# EAGLE board MTP_worp1 (EAGLE 7.5.0)
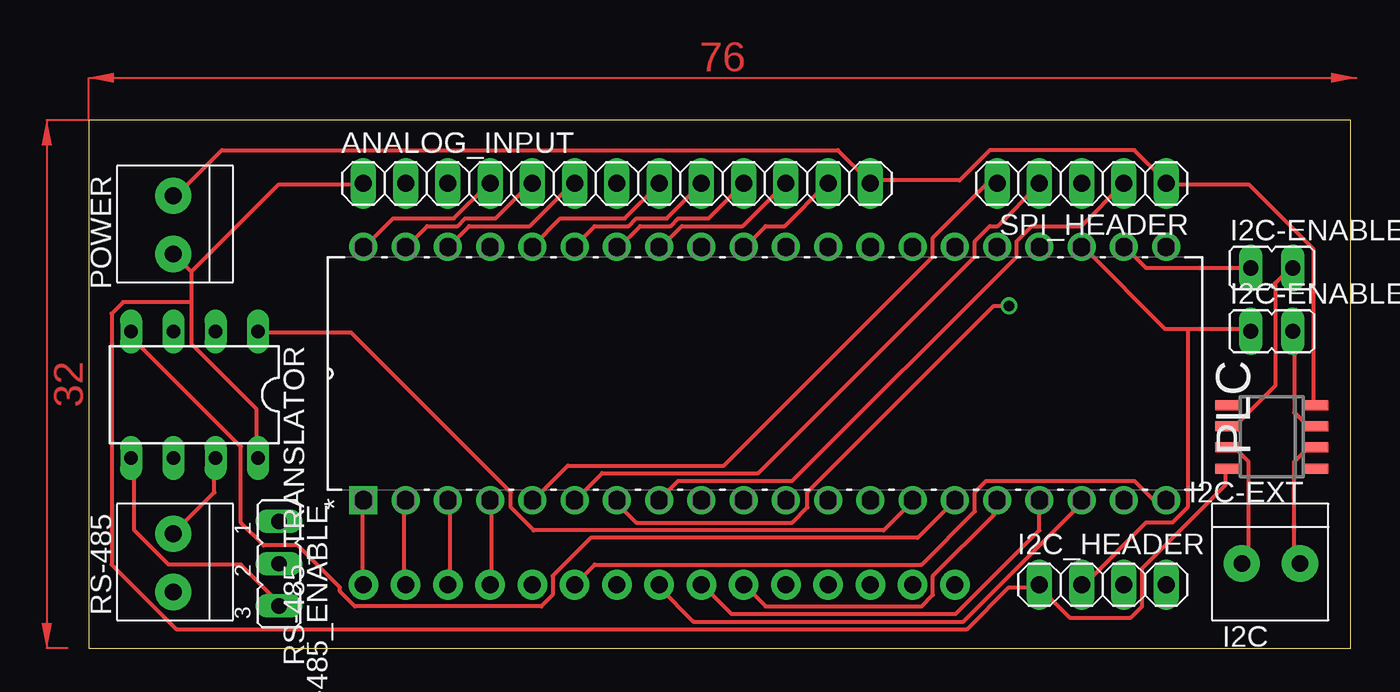
[diagram p0: board, top side]
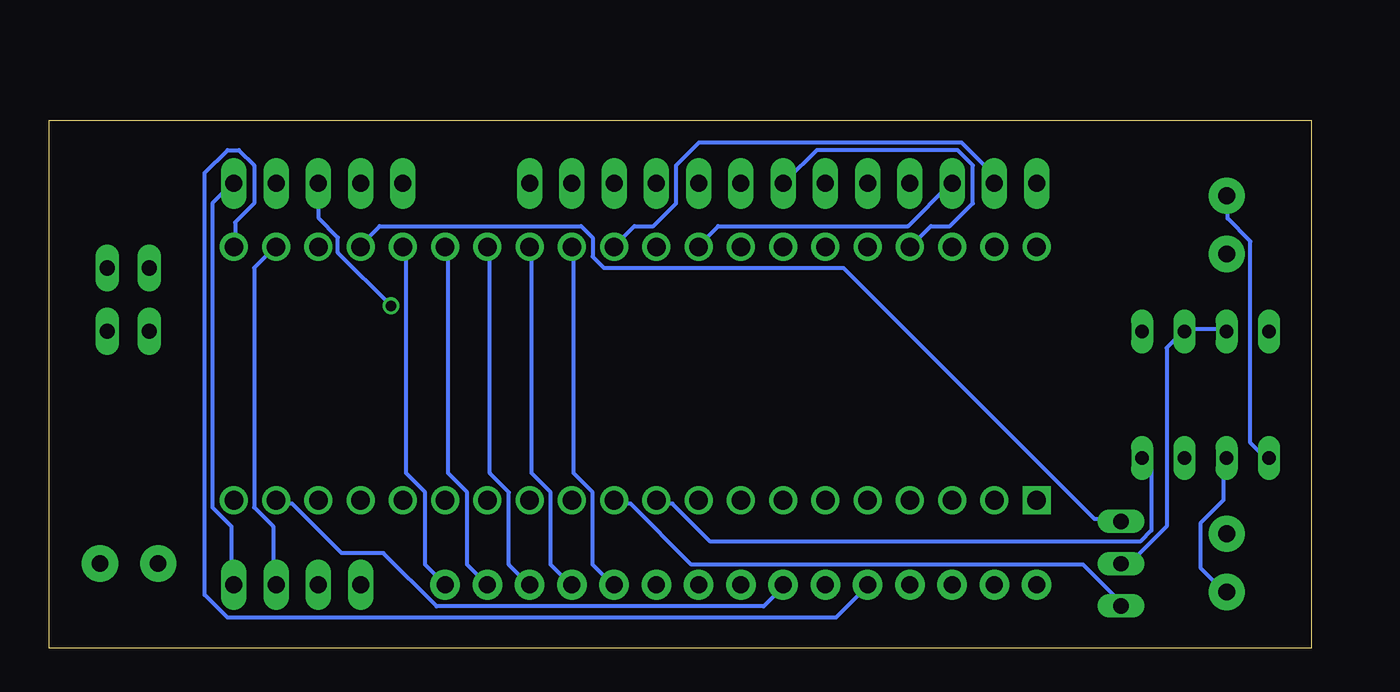
[diagram p1: board, bottom side, seen from below]

Size 75.87 x 31.74 mm. Coordinates in mm from the lower left corner, seen from the top.
Outline: 0,0 75.87,0 75.87,31.74 0,31.74 0,0
Copper layers (1*16): Top 0.035mm / dielectric 1.5mm / Bottom 0.035mm
Design rules "default": minimum track width 10mil, minimum drill 24mil, track to track 8mil, track to pad 8mil, pad to pad 8mil, via to via 8mil, smd to smd 8mil, copper to edge 40mil, drill to drill 8mil, minimum pad ring 10mil, minimum via ring 8mil, stop-mask expansion 4mil, vias tented up to drill 0mil, thermal gap 10mil

## Footprints (pad centres in the part's own frame; a part is rotated, then mirrored left to right if it is on the bottom)
1X13 = drill 1.016 long: 1 -15.24,0; 2 -12.7,0; 3 -10.16,0; 4 -7.62,0; 5 -5.08,0; 6 -2.54,0; 7 0,0; 8 2.54,0; 9 5.08,0; 10 7.62,0; 11 10.16,0; 12 12.7,0; 13 15.24,0
1X15-CB = drill 1.016 pad 1.778: 1 -17.78,0; 2 -15.24,0; 3 -12.7,0; 4 -10.16,0; 5 -7.62,0; 6 -5.08,0; 7 -2.54,0; 8 0,0; 9 2.54,0; 10 5.08,0; 11 7.62,0; 12 10.16,0; 13 12.7,0; 14 15.24,0; 15 17.78,0
1X2-3.5MM = drill 1 pad 2.184: 1 1.8,0; 2 -1.7,0
JP1 = drill 0.914 long: 1 0,-1.27; 2 0,1.27
SO8 = smd 0.6 x 1.6: 1 -1.905,-2.6; 2 -0.635,-2.6; 3 0.635,-2.6; 4 1.905,-2.6; 5 1.905,2.6; 6 0.635,2.6; 7 -0.635,2.6; 8 -1.905,2.6
1X04 = drill 1.016 long: 1 -3.81,0; 2 -1.27,0; 3 1.27,0; 4 3.81,0
DIP254P1524X482-40 = drill 1.118 square: 1 -15.24,48.26 | drill 1.118: 2 -15.24,45.72; 3 -15.24,43.18; 4 -15.24,40.64; 5 -15.24,38.1; 6 -15.24,35.56; 7 -15.24,33.02; 8 -15.24,30.48; 9 -15.24,27.94; 10 -15.24,25.4; 11 -15.24,22.86; 12 -15.24,20.32; 13 -15.24,17.78; 14 -15.24,15.24; 15 -15.24,12.7; 16 -15.24,10.16; 17 -15.24,7.62; 18 -15.24,5.08; 19 -15.24,2.54; 20 -15.24,0; 21 0,0; 22 0,2.54; 23 0,5.08; 24 0,7.62; 25 0,10.16; 26 0,12.7; 27 0,15.24; 28 0,17.78; 29 0,20.32; 30 0,22.86; 31 0,25.4; 32 0,27.94; 33 0,30.48; 34 0,33.02; 35 0,35.56; 36 0,38.1; 37 0,40.64; 38 0,43.18; 39 0,45.72; 40 0,48.26
JP2 = drill 0.914 long: 1 -2.54,0; 2 0,0; 3 2.54,0
DIL08 = drill 0.813 long: 1 -3.81,-3.81; 2 -1.27,-3.81; 3 1.27,-3.81; 4 3.81,-3.81; 5 3.81,3.81; 6 1.27,3.81; 7 -1.27,3.81; 8 -3.81,3.81
1X05 = drill 1.016 long: 1 -5.08,0; 2 -2.54,0; 3 0,0; 4 2.54,0; 5 5.08,0

## Placement (x,y rotation side)
ANALOG_INPUT  [1X13]  31.75,27.94 0 top
GPIO  [1X15-CB]  34.29,3.81 0 top
I2C  1X2-3.5MM  [1X2-3.5MM]  71.12,5.08 180 top
I2C-ENABLE1  [JP1]  71.12,19.05 270 top
I2C-ENABLE2  [JP1]  71.12,22.86 270 top
I2C-EXT  P82B715  [SO8]  71.12,12.7 90 top
I2C_HEADER  [1X04]  60.96,3.81 0 top
PLC  ATMEGA32  [DIP254P1524X482-40]  64.77,24.13 90 top
POWER  1X2-3.5MM  [1X2-3.5MM]  5.08,25.4 90 top
RS-485  1X2-3.5MM  [1X2-3.5MM]  5.08,5.08 90 top
RS-485_ENABLE  [JP2]  11.43,5.08 270 top
RS-485_TRANSLATOR  MAX485  [DIL08]  6.35,15.24 180 top
SPI_HEADER  [1X05]  59.69,27.94 180 top

## Library data of the parts
ANALOG_INPUT I2C_HEADER SPI_HEADER = pinhead
GPIO I2C POWER RS-485 = adafruit
I2C-ENABLE1 I2C-ENABLE2 RS-485_ENABLE = jumper
I2C-EXT = micro-philips; MPN: P82B715TD,118; OC_FARNELL: 1627047; OC_NEWARK: 70R8457
PLC = ArpanMTP1
RS-485_TRANSLATOR = maxim; OC_FARNELL: unknown; OC_NEWARK: unknown

## Nets
ADC0: ANALOG_INPUT.4 PLC.40
ADC1: ANALOG_INPUT.5 PLC.39
ADC2: ANALOG_INPUT.6 PLC.38
ADC3: ANALOG_INPUT.7 PLC.37
ADC4: ANALOG_INPUT.8 PLC.36
ADC5: ANALOG_INPUT.9 PLC.35
ADC6: ANALOG_INPUT.10 PLC.34
ADC7: ANALOG_INPUT.11 PLC.33
AGND: ANALOG_INPUT.12 PLC.31
AREF: ANALOG_INPUT.3 PLC.32
AVCC: ANALOG_INPUT.2 PLC.30
GND: ANALOG_INPUT.13 I2C-EXT.4 I2C_HEADER.4 PLC.11 POWER.1 RS-485_ENABLE.3 RS-485_TRANSLATOR.5 SPI_HEADER.1
GPIO1: GPIO.1 PLC.1
GPIO2: GPIO.2 PLC.2
GPIO3: GPIO.3 PLC.3
GPIO4: GPIO.4 PLC.4
GPIO5: GPIO.5 PLC.21
GPIO6: GPIO.6 PLC.20
GPIO7: GPIO.7 PLC.19
GPIO8: GPIO.8 PLC.18
GPIO9: GPIO.9 PLC.17
GPIO10: GPIO.10 PLC.16
GPIO11: GPIO.11 PLC.29
GPIO12: GPIO.12 PLC.28
GPIO13: GPIO.13 PLC.27
GPIO14: GPIO.14 PLC.26
GPIO15: GPIO.15 PLC.25
GPIO16: PLC.24 RS-485_ENABLE.1
LCL: I2C-EXT.7 I2C.1
LDA: I2C-EXT.2 I2C.2
MISO: PLC.7 SPI_HEADER.3
MOSI: PLC.6 SPI_HEADER.4
N$1: I2C-ENABLE2.2 I2C-EXT.6
N$13: I2C-ENABLE1.2 I2C-EXT.3
RS-485_A: RS-485.1 RS-485_TRANSLATOR.7
RS-485_B: RS-485.2 RS-485_TRANSLATOR.6
RS-485_MODE_SELECT: RS-485_ENABLE.2 RS-485_TRANSLATOR.2 RS-485_TRANSLATOR.3
RXD: PLC.14 RS-485_TRANSLATOR.1
SCK: PLC.8 SPI_HEADER.2
SCL: I2C-ENABLE2.1 I2C_HEADER.3 PLC.22
SDA: I2C-ENABLE1.1 I2C_HEADER.2 PLC.23
SS: PLC.5 SPI_HEADER.5
TXD: PLC.15 RS-485_TRANSLATOR.4
VCC: ANALOG_INPUT.1 I2C-EXT.8 I2C_HEADER.1 PLC.10 POWER.2 RS-485_TRANSLATOR.8

## Tracks (layer width: path | path; a pad name or v marks a point on that pad's centre or on a via)
ADC0
  Top 0.254: ANALOG_INPUT.4 24,27.89 21.95,25.83 18.29,25.83 16.69,24.23 PLC.40
ADC1
  Top 0.254: ANALOG_INPUT.5 26.52,27.89 24.46,25.83 22.63,25.83 22.17,25.38 20.34,25.38 19.2,24.23 PLC.39
ADC2
  Top 0.254: ANALOG_INPUT.6 29.03,27.89 26.52,25.38 22.86,25.38 21.72,24.23 PLC.38
ADC3
  Bottom 0.254: ANALOG_INPUT.7 31.55,28.12 29.72,29.95 21.26,29.95 20.34,29.03 20.34,26.75 21.72,25.38 22.86,25.38 24,24.23 PLC.37
ADC4
  Top 0.254: ANALOG_INPUT.8 34.29,27.89 32.23,25.83 28.35,25.83 26.75,24.23 PLC.36
ADC5
  Top 0.254: ANALOG_INPUT.9 36.8,27.89 34.75,25.83 32.92,25.83 32.46,25.38 30.4,25.38 29.26,24.23 PLC.35
ADC6
  Top 0.254: ANALOG_INPUT.10 37.26,25.83 35.43,25.83 34.98,25.38 33.15,25.38 31.77,24 PLC.34
ADC7
  Top 0.254: ANALOG_INPUT.11 41.83,27.89 39.32,25.38 35.66,25.38 34.29,24 PLC.33
AGND
  Top 0.254: ANALOG_INPUT.12 44.35,27.89 41.83,25.38 40.69,25.38 39.55,24.23 PLC.31
AREF
  Bottom 0.254: ANALOG_INPUT.3 21.72,27.89 24.23,25.38 35.66,25.38 36.8,24.23 PLC.32
AVCC
  Bottom 0.254: ANALOG_INPUT.2 19.2,28.12 19.2,28.57 21.03,30.4 36.8,30.4 38.18,29.03 38.18,26.75 39.55,25.38 40.69,25.38 41.83,24.23 PLC.30
GND
  Top 0.254: I2C-EXT.4 73.61,14.63 73.61,24 69.72,27.89 64.92,27.89 SPI_HEADER.1 64.69,28.12 62.87,29.95 54.18,29.95 52.35,28.12 47.09,28.12 ANALOG_INPUT.13 46.86,28.12 45.03,29.95 8,29.95 5.26,27.2 POWER.1 | RS-485_TRANSLATOR.5 2.74,11.43 2.74,7.09 4.8,5.03 9.14,5.03 11.43,2.74 RS-485_ENABLE.3
  Bottom 0.254: I2C_HEADER.4 64.92,3.89 64.92,7.32 66.06,8.46 66.06,26.75 64.92,27.89 SPI_HEADER.1 | PLC.11 41.83,8.69 40.92,8.69 37.26,5.03 13.72,5.03 11.43,2.74 RS-485_ENABLE.3 | POWER.1 5.03,26.98 5.03,25.83 3.66,24.46 3.66,12.34 2.74,11.43 RS-485_TRANSLATOR.5
GPIO1
  Top 0.254: PLC.1 16.46,8.69 16.46,3.89 GPIO.1
GPIO2
  Top 0.254: PLC.2 18.97,8.69 18.97,3.89 GPIO.2
GPIO3
  Top 0.254: PLC.3 21.72,8.69 21.72,3.89 GPIO.3
GPIO4
  Top 0.254: PLC.4 24.23,8.69 24.23,3.89 GPIO.4
GPIO5
  Bottom 0.254: PLC.21 64.69,24.23 64.69,25.6 63.55,26.75 63.55,29.03 64.47,29.95 65.15,29.95 66.52,28.57 66.52,3.2 65.15,1.83 28.57,1.83 26.75,3.66 GPIO.5
GPIO6
  Top 0.254: PLC.20 64.69,8.91 64.01,8.91 62.87,10.06 53.95,10.06 53.26,9.37 53.26,8.23 50.06,5.03 30.4,5.03 29.26,3.89 GPIO.6
GPIO7
  Bottom 0.254: PLC.19 62.18,8.69 61.27,8.69 58.29,5.71 55.78,5.71 52.58,2.52 32.92,2.52 31.77,3.66 GPIO.7
GPIO8
  Top 0.254: PLC.18 59.66,8.69 52.58,1.6 36.35,1.6 34.29,3.66 GPIO.8
GPIO9
  Top 0.254: PLC.17 57.15,7.09 52.12,2.06 38.63,2.06 37.03,3.66 GPIO.9
GPIO10
  Top 0.254: PLC.16 54.41,8.69 54.41,8 50.75,4.34 50.75,3.2 50.06,2.52 40.69,2.52 39.55,3.66 GPIO.10
GPIO11
  Bottom 0.254: PLC.29 44.35,24 44.35,10.52 43.2,9.37 43.2,5.03 42.06,3.89 GPIO.11
GPIO12
  Bottom 0.254: PLC.28 46.86,24 46.86,10.52 45.72,9.37 45.72,5.03 44.58,3.89 GPIO.12
GPIO13
  Bottom 0.254: PLC.27 49.38,24 49.38,10.52 48.23,9.37 48.23,5.03 47.09,3.89 GPIO.13
GPIO14
  Bottom 0.254: GPIO.14 50.75,5.03 50.75,9.37 51.89,10.52 51.89,24 PLC.26
GPIO15
  Bottom 0.254: PLC.25 54.41,24 54.41,10.52 53.26,9.37 53.26,5.03 52.12,3.89 GPIO.15
GPIO16
  Bottom 0.254: RS-485_ENABLE.1 11.43,7.77 13.03,7.77 28.12,22.86 42.52,22.86 43.2,23.55 43.2,24.69 43.89,25.38 56.01,25.38 57.15,24.23 PLC.24
LCL
  Top 0.254: I2C-EXT.7 68.58,11.89 69.04,11.89 69.72,11.2 69.72,5.49 69.49,5.26 I2C.1
LDA
  Top 0.254: I2C-EXT.2 73.61,11.89 73.15,11.89 72.47,11.2 72.47,5.49 72.69,5.26 I2C.2
MISO  (via drill 0.61)
  Top 0.254: v55.32,20.57 54.41,20.57 43.2,9.37 43.2,8.46 42.29,7.54 32.92,7.54 31.77,8.69 PLC.7
  Bottom 0.254: v55.32,20.57 58.52,23.77 58.52,24.69 59.66,25.83 59.66,27.89 SPI_HEADER.3
MOSI
  Top 0.254: SPI_HEADER.4 57.15,27.89 54.63,25.38 54.18,25.38 53.26,24.46 53.26,23.55 40.23,10.52 30.86,10.52 29.26,8.91 PLC.6
N$1
  Top 0.254: I2C-EXT.6 68.58,13.49 69.04,13.49 71.32,15.77 71.32,21.95 72.24,22.86 I2C-ENABLE2.2
N$13
  Top 0.254: I2C-EXT.3 73.61,13.49 73.15,13.49 72.47,14.17 72.47,18.97 I2C-ENABLE1.2
RS-485_A
  Top 0.254: RS-485_TRANSLATOR.7 7.54,11.43 7.54,9.37 5.26,7.09 RS-485.1
RS-485_B
  Bottom 0.254: RS-485_TRANSLATOR.6 5.26,11.43 5.26,8.91 6.63,7.54 6.63,4.8 5.26,3.43 RS-485.2
RS-485_MODE_SELECT
  Bottom 0.254: RS-485_TRANSLATOR.3 5.26,19.2 7.54,19.2 RS-485_TRANSLATOR.2 7.77,18.97 8.69,18.06 8.69,7.32 10.74,5.26 11.43,5.26 RS-485_ENABLE.2
RXD
  Top 0.254: RS-485_TRANSLATOR.1 10.29,18.97 15.77,18.97 25.38,9.37 25.38,8.46 26.75,7.09 47.78,7.09 49.38,8.69 PLC.14
SCK
  Top 0.254: SPI_HEADER.2 59.66,25.38 56.69,25.38 55.78,24.46 55.78,23.55 42.29,10.06 35.43,10.06 34.29,8.91 PLC.8
SCL
  Top 0.254: I2C-ENABLE2.1 63.55,22.86 62.41,24 PLC.22
  Bottom 0.254: I2C_HEADER.3 62.41,3.89 62.41,7.32 63.55,8.46 63.55,22.86 62.41,24 PLC.22
SDA
  Top 0.254: 66.06,19.2 64.69,19.2 59.89,24 PLC.23 | 66.06,19.2 69.72,19.2 I2C-ENABLE1.1 | 66.06,19.2 66.06,8.46 65.15,7.54 63.55,7.54 59.89,3.89 I2C_HEADER.2
SS
  Top 0.254: SPI_HEADER.5 54.41,27.89 53.95,27.89 50.75,24.69 50.75,23.55 38.18,10.97 28.8,10.97 26.75,8.91 PLC.5
TXD
  Top 0.254: RS-485_TRANSLATOR.4 2.74,18.97 2.74,18.52 9.14,12.12 9.14,7.54 10.52,6.17 12.57,6.17 15.09,3.66 15.09,3.43 16,2.52 27.2,2.52 27.89,3.2 27.89,4.34 30.18,6.63 49.84,6.63 51.89,8.69 PLC.15
VCC
  Top 0.254: 57.15,3.66 58.98,1.83 62.64,1.83 63.32,2.52 63.32,4.8 68.35,9.83 68.35,10.74 I2C-EXT.8 | 6.17,22.63 6.17,20.8 | 6.17,20.8 6.17,18.29 10.06,14.4 10.06,11.43 RS-485_TRANSLATOR.8 | 6.17,22.63 5.26,23.55 POWER.2 | 6.17,22.63 11.43,27.89 16.46,27.89 ANALOG_INPUT.1 | 57.15,3.66 55.32,3.66 52.81,1.14 5.26,1.14 1.37,5.03 1.37,20.12 2.06,20.8 6.17,20.8 | 57.15,3.66 I2C_HEADER.1
  Bottom 0.254: PLC.10 39.32,8.69 38.41,8.69 36.12,6.4 10.29,6.4 9.6,7.09 9.6,10.97 10.06,11.43 RS-485_TRANSLATOR.8
(copper drawn outside any net)
  shapes: Top area x2